# Altium PCB PCB1.PcbDoc
Units mil, origin at the board's own origin, x right, y up, seen from the top; angles counter-clockwise.
Board outline 6000 x 4000 mil, 2 copper layers (Top Layer, Bottom Layer); 70 components, 46 nets, 159 pads, 17 vias.
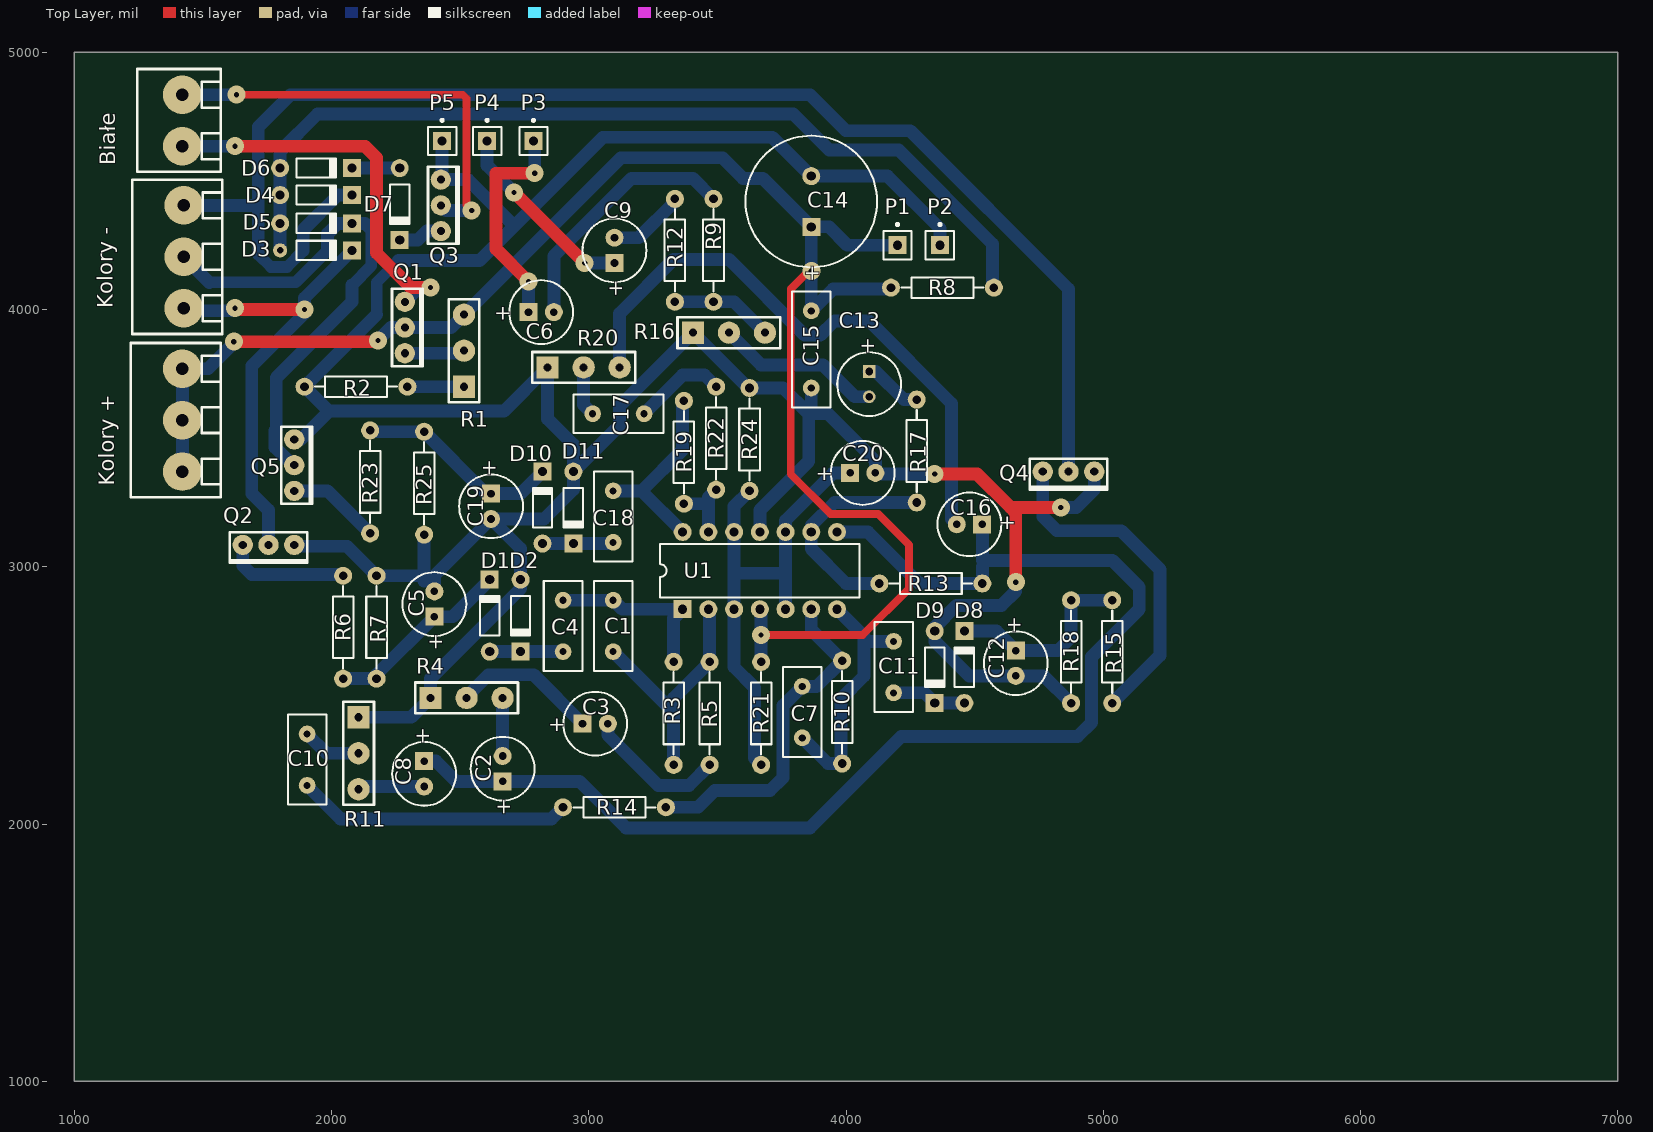
[diagram p0: Top Layer view]
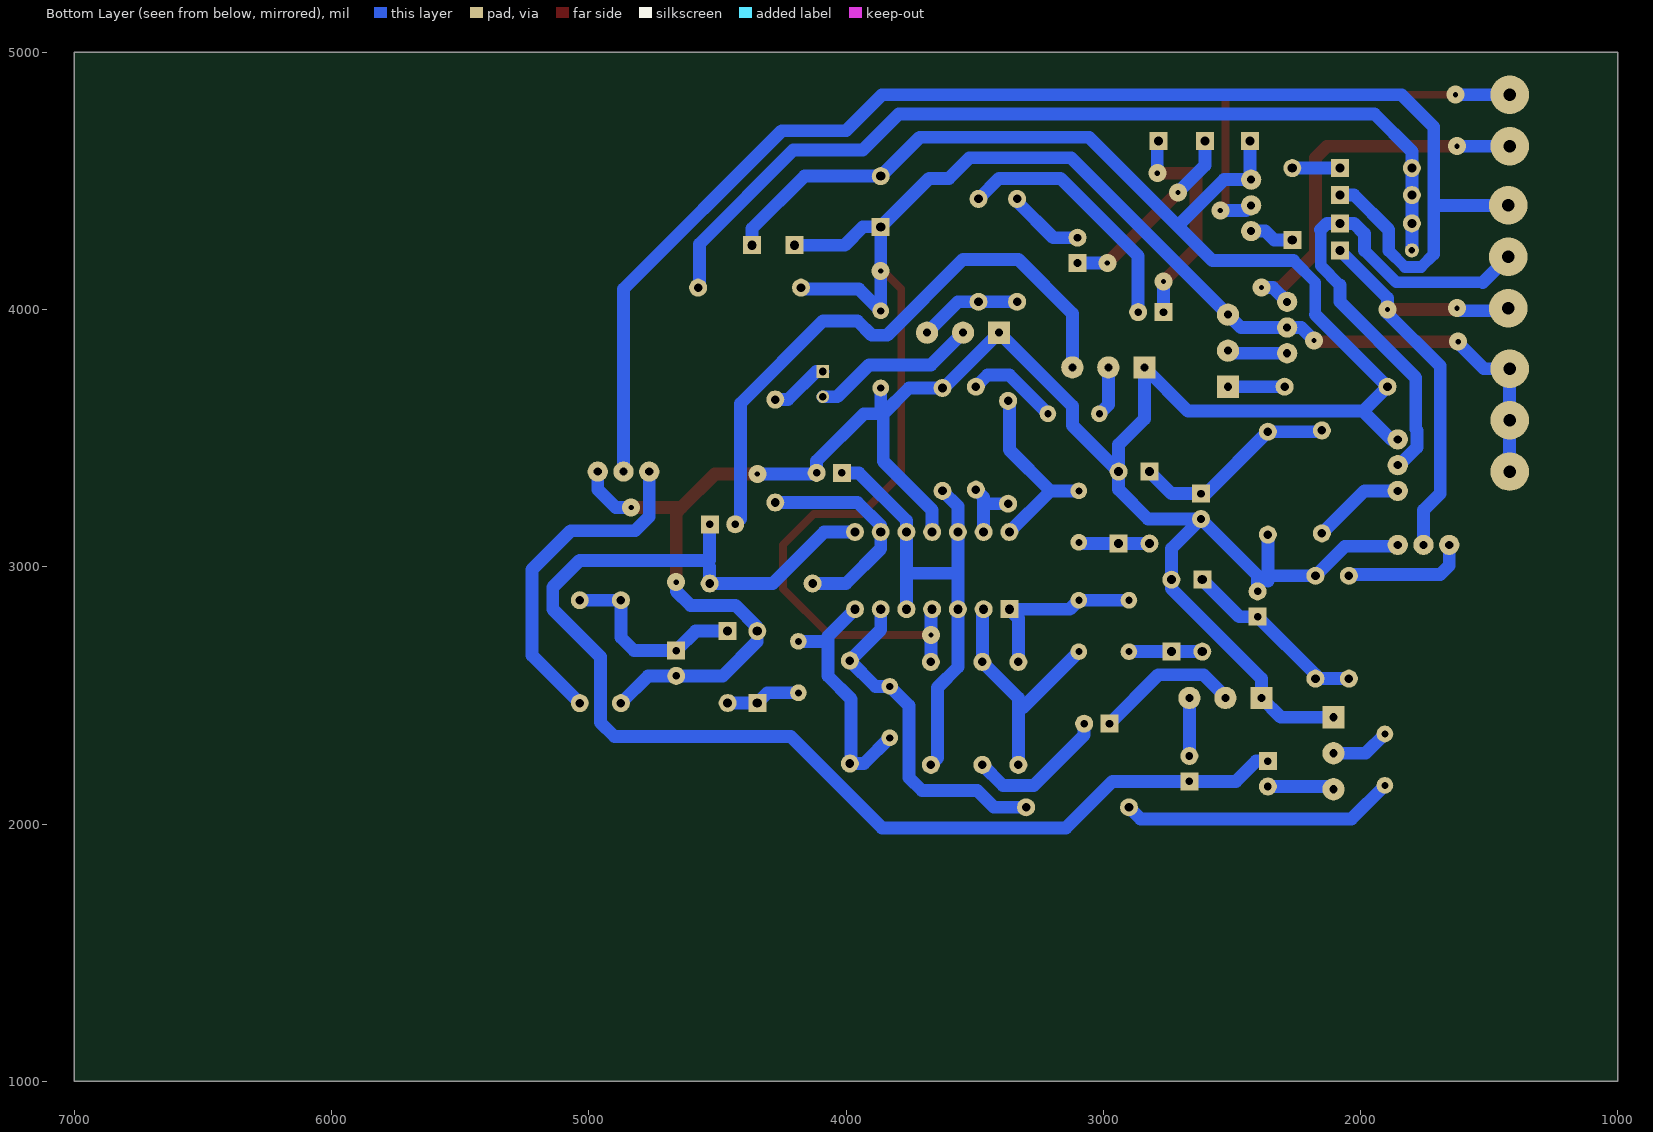
[diagram p1: Bottom Layer view, seen from below]

## Layer stack, top to bottom
Top Solder: solder mask 0.4, Solder Resist, Dk 3.5
Top Layer: signal copper 1.4
Dielectric1: dielectric 12.6, FR-4, Dk 4.8
Bottom Layer: signal copper 1.4
Bottom Solder: solder mask 0.4, Solder Resist, Dk 3.5

## Board outline
1000,1000 7000,1000 7000,5000 1000,5000

## Design rules (kind name [scope] priority, off if disabled: settings)
Clearance [All] p1: gap=10
PolygonConnect [All] p1: connectstyle=Relief reliefconductorwidth=10 reliefentries=4 polygonreliefangle="90 Angle" airgapwidth=10
RoomDefinition Sheet1 [InComponentClass('Sheet1')] p1: confinementstyle=ConfineIn formatcopy=TRUE lockcomponents=FALSE outline 1030,1925 5295,1925 5295,4980 1030,4980
RoutingVias [All] p1: holewidth=28 width=50 viastyle="Through Hole" minholewidth=28 minwidth=50 maxholewidth=28 maxwidth=50
SolderMaskExpansion [All] p1: expansion=4
Width [All] p1: maxlimit=100 minlimit=10 preferedwidth=50
29 further rules are at their usual default settings.

## Components (designator, comment, footprint, x,y, rotation, side; value= is the part's Value field where it differs from the comment)
Białe "ARK" ARK2 1420,4735 r270 top
C1 "Cap" RAD-0.2 3095,2770 r90 top
C2 "Cap Pol1" CAPPR2.5-6.3x5#1 2665,2215 r90 top
C3 "Cap Pol1" CAPPR2.5-6.3x5#1 3025,2390 r0 top
C4 "Cap" RAD-0.2 2900,2770 r270 top
C5 "Cap Pol1" CAPPR2.5-6.3x5#1 2400,2855 r90 top
C6 "Cap Pol1" CAPPR2.5-6.3x5#1 2815,3990 r0 top
C7 "Cap" RAD-0.2 3830,2435 r270 top
C8 "Cap Pol1" CAPPR2.5-6.3x5#1 2360,2195 r270 top
C9 "Cap Pol1" CAPPR2.5-6.3x5#1 3100,4230 r90 top
C10 "Cap" RAD-0.2 1905,2250 r270 top
C11 "Cap" RAD-0.2 4185,2610 r270 top
C12 "Cap Pol1" CAPPR2.5-6.3x5#1 4660,2625 r270 top
C13 "Cap Pol1" CAPPR2.5-6.3x5#2 4090,3710 r270 top
C14 "Cap Pol1" CAPPR5-13x16 3865,4420 r90 top
C15 "Cap" RAD-0.3 3865,3845 r90 top
C16 "Cap Pol1" CAPPR2.5-6.3x5#1 4480,3165 r180 top
C17 "Cap" RAD-0.2 3115,3595 r0 top
C18 "Cap" RAD-0.2 3095,3195 r270 top
C19 "Cap Pol1" CAPPR2.5-6.3x5#1 2620,3235 r270 top
C20 "Cap Pol1" CAPPR2.5-6.3x5#1 4065,3365 r0 top
D1 "Diode 1N4148" DO-35#1 2615,2810 r90 top
D2 "Diode 1N4148" DO-35#1 2735,2810 r270 top
D3 "Diode 1N4148" DO-35#2 1940,4230 r0 top
D4 "Diode 1N4148" DO-35#1 1940,4445 r0 top
D5 "Diode 1N4148" DO-35#1 1940,4335 r0 top
D6 "Diode 1N4148" DO-35#1 1940,4550 r0 top
D7 "Diode 1N4148" DO-35#1 2265,4410 r270 top
D8 "Diode 1N4148" DO-35#1 4460,2610 r90 top
D9 "Diode 1N4148" DO-35#1 4345,2610 r270 top
D10 "Diode 1N4148" DO-35#1 2820,3230 r90 top
D11 "Diode 1N4148" DO-35#1 2940,3230 r270 top
"Kolory +" "ARK3" ARK3 1420,3570 r270 top
"Kolory -" "ARK3" ARK3 1425,4205 r270 top
P1 "Plug" PIN1 4200,4250 r0 top
P2 "Plug" PIN1 4365,4250 r0 top
P3 "Plug" PIN1 2785,4655 r0 top
P4 "Plug" PIN1 2605,4655 r0 top
P5 "Plug" PIN1 2430,4655 r0 top
Q1 "BD139N" BD139N 2285,4030 r270 top
Q2 "BD139N" BD139N 1855,3085 r180 top
Q3 "BD139N" BD139N 2425,4505 r270 top
Q4 "BD139N" BD139N 4965,3370 r180 top
Q5 "BD139N" BD139N 1855,3495 r270 top
R1 "4,7" Potencjometr 2515,3840 r90 top
R2 "Res2" AXIAL-0.4 2095,3700 r0 top
R3 "Res2" AXIAL-0.4 3330,2430 r90 top
R4 "4,7" Potencjometr 2525,2490 r0 top
R5 "Res2" AXIAL-0.4 3470,2430 r90 top
R6 "Res2" AXIAL-0.4 2045,2765 r270 top
R7 "Res2" AXIAL-0.4 2175,2765 r270 top
R8 "Res2" AXIAL-0.4 4375,4085 r180 top
R9 "Res2" AXIAL-0.4 3485,4230 r270 top
R10 "Res2" AXIAL-0.4 3985,2435 r270 top
R11 "4,7" Potencjometr 2105,2275 r270 top
R12 "Res2" AXIAL-0.4 3335,4230 r270 top
R13 "Res2" AXIAL-0.4 4330,2935 r0 top
R14 "Res2" AXIAL-0.4 3100,2065 r0 top
R15 "Res2" AXIAL-0.4 5035,2670 r90 top
R16 "4,7K" Potencjometr 3545,3910 r0 top
R17 "Res2" AXIAL-0.4 4275,3450 r270 top
R18 "Res2" AXIAL-0.4 4875,2670 r90 top
R19 "Res2" AXIAL-0.4 3370,3445 r90 top
R20 "4,7" Potencjometr 2980,3775 r0 top
R21 "Res2" AXIAL-0.4 3670,2430 r270 top
R22 "Res2" AXIAL-0.4 3495,3500 r270 top
R23 "Res2" AXIAL-0.4 2150,3330 r90 top
R24 "Res2" AXIAL-0.4 3625,3495 r270 top
R25 "Res2" AXIAL-0.4 2360,3325 r90 top
U1 "LM324AN" N014 3665,2985 r0 top

## Footprints (in the part's own frame and the unit in brackets; to place one, negate y for a bottom-side part, rotate by r counter-clockwise, add the part's x,y. Pads: shape width x height; smd on the part's side, far side on the other; paste and mask are expansions set on the pad)
ARK2 [mil]
  round 150 hole 48: 1(-100,0) 2(100,0)
  silkscreen extent -200,-175 200,150
ARK3 [mil]
  round 150 hole 48: 1(-200,0) 2(0,0) 3(200,0)
  silkscreen extent -300,-200 300,150
AXIAL-0.4 [mil] "Axial Device, Thru-Hole; 2 Leads; 0.4 in Pin Spacing"
  round 70 hole 33.46: 1(-200,0) 2(200,0)
  silkscreen extent -160,-40 160,40
BD139N [mm]
  round 2 hole 0.8: 1(5.08,0) 2(2.54,0) 3(0,0)
  silkscreen extent -1.27,-1.27 6.35,1.78
CAPPR2.5-6.3x5#1 [mil] "Capacitor, Electrolytic, Radial; Body 6.3 x 5 mm (Dia.xH typ); Pin Spacing 2.5 mm (typ)"
  rect 70x70 hole 29.53: 1(-49.21,0)
  round 70 hole 29.53: 2(49.21,0)
  silkscreen extent -124,-124 124,124
CAPPR2.5-6.3x5#2 [mil] "Capacitor, Electrolytic, Radial; Body 6.3 x 5 mm (Dia.xH typ); Pin Spacing 2.5 mm (typ)"
  rect 49.21x49.21 hole 29.53: 1(-49.21,0)
  round 49.21 hole 29.53: 2(49.21,0)
  silkscreen extent -124,-124 124,124
CAPPR5-13x16 [mil] "Capacitor, Electrolytic, Radial; Body 13 x 16 mm (Dia.xH typ); Pin Spacing 5 mm (typ)"
  rect 70x70 hole 35.43: 1(-98.43,0)
  round 70 hole 35.43: 2(98.43,0)
  silkscreen extent -256,-256 256,256
DO-35#1 [mil] "Diode, Axial; Body 3.8 x 1.9 mm (LxDia. max), Lead Dia. 0.53 mm (max)"
  round 70 hole 35.43: 1(-139.76,0)
  rect 70x70 hole 35.43: 2(139.76,0)
  silkscreen extent -77,-37 81,37
DO-35#2 [mil] "Diode, Axial; Body 3.8 x 1.9 mm (LxDia. max), Lead Dia. 0.53 mm (max)"
  round 55 hole 25: 1(-139.76,0)
  rect 70x70 hole 35.43: 2(139.76,0)
  silkscreen extent -77,-37 81,37
N014 [mil] "DIP; 14 Leads; Row Spacing 7.62 mm; Pitch 2.54 mm"
  rect 70x70 hole 35.43: 1(-300,-150)
  round 70 hole 35.43: 2(-200,-150) 3(-100,-150) 4(0,-150) 5(100,-150) 6(200,-150) 7(300,-150) 8(300,150) 9(200,150) 10(100,150) 11(0,150) 12(-100,150) 13(-200,150) 14(-300,150)
  silkscreen extent -388,-104 388,104
PIN1 [mil] "Connector; Plug"
  rect 70x70 hole 35.43: 1(0,0)
  silkscreen extent -55,-55 55,86
Potencjometr [mm]
  rect 2.2x2.2 hole 0.8: 1(-3.556,0)
  round 2.2 hole 0.8: 2(0,0) 3(3.556,0)
  silkscreen extent -5.08,-1.52 5.08,1.52
RAD-0.2 [mil] "Radial Cap, Thru-Hole; 2 Leads; 0.2 in Pin Spacing"
  round 65 hole 27.56: 1(-100,0) 2(100,0)
  silkscreen extent -175,-75 175,75
RAD-0.3 [mil] "Radial Cap, Thru-Hole; 2 Leads; 0.3 in Pin Spacing"
  round 65 hole 27.56: 1(-150,0) 2(150,0)
  silkscreen extent -225,-75 225,75

## Part data
C1 C4 C7 C10 C11 C15 C17 C18: "Capacitor"
C2 C3 C5 C6 C8 C9 C12 C13 C14 C16 C19 C20: "Polarized Capacitor (Radial)"
D1 D2 D3 D4 D5 D6 D7 D8 D9 D10 D11: "High Conductance Fast Diode"
R1 R4 R11 R16 R20: library part Potencjometr
R2 R3 R5 R6 R7 R8 R9 R10 R12 R13 R14 R15 R17 R18 R19 R21 R22 R23 R24 R25: "Resistor"
U1: "Quadruple Operational Amplifier"

## Via types
v1: diameter 70, hole 20, Top Layer to Bottom Layer, 17 vias

## Nets (pads, with @x,y where several pads share a name; then routed paths per layer and width w, separated by ;. In a path a pad name is that pad's centre, name@x,y a point inside that pad or via, vN(x,y) a via of type N, cw(c..) or ccw(c..) an arc to the next point about the centre after c; other vN are vias at no path point)
GND: C5.2 C12.2 C14.2 C15.1 C19.2 C20.2 D2.1 D9.1 D11.1 P2.1 P5.1 Q2.3 Q3.3 Q4.3 Q5.3 R2.1 R4.1 R7.1 R11.1 R16.1 R18.1 R20.1 R24.1 R25.1 U1.11 | length 12783.7
  Top Layer w50: v1(4345,3360) 4510,3360 4640,3230 ; v1(4660,2940) 4660,3210 4640,3230 ; v1(4835,3230) 4640,3230
  Bottom Layer w45: 2175,3980 2175,4105 2260,4190
  Bottom Layer w50: Q2.3 1860,3080 2060,3080 R7.1 2339.21,2965 ; Q5.3 1880,3495 1990,3605 ; R11.1 2310,2415 R4.1 2385,2565 2735,2915 D2.1 2735,3070.79 C19.2 ; 2175,3980 R2.1 1990,3605 ; 2260,4190 2575,4190 3055,4670 3713.43,4670 C14.2 4161.57,4518.43 4365,4315 P2.1 ; 2360,2944.21 R25.1 ; C5.2 2400,2965.79 C19.2 ; Q3.3 2530,4505 2707.5,4327.5 ; Q3.3@2430,4510 P5.1 ; U1.11 3665,3220 3855,3410 3855,3595 ; 3865,3605 C15.1 ; v1(4345,3360) 4119.21,3360 C20.2 4114.21,3410.79 3930,3595 3855,3595 ; v1(4660,2940) 4660,2905 4605,2850 4430,2850 4345,2765 D9.1 4345,2710 4479.21,2575.79 C12.2 4769.21,2575.79 R18.1 ; v1(4835,3230) 4895,3230 4965,3300 Q4.3 ; 1990,3605 2670,3605 R20.1 2840,3575 2940,3475 D11.1 ; C19.2 2825.79,3185.79 2940,3300 D11.1 ; D11.1 3120,3549.76 3120,3625 R16.1 3620,3695 R24.1 3755,3695 3855,3595
NetBiałe_1: Białe.1 Q3.2 | length 1682.8
  Top Layer w30: v1(1630,4835) 2510,4835 2525,4820 2525,4405 v1(2545,4385)
  Bottom Layer w50: Białe.1 v1(1630,4835) ; Q3.2 2445,4385 v1(2545,4385)
NetBiałe_2: Białe.2 Q1.3 | length 1532.3
  Top Layer w50: v1(1625,4635) 2130,4635 2175,4590 2175,4220 2310,4085 v1(2385,4085)
  Bottom Layer w50: Białe.2 v1(1625,4635) ; Q1.3 2340,4085 v1(2385,4085)
NetC1_1: C1.1 R3.1 R5.2 U1.2 | length 976.2
  Bottom Layer w50: C1.1 3315,2450 ; R3.1 3330,2490 R5.2 3470,2830 U1.2
NetC1_2: C1.2 C4.1 R3.2 U1.1 | length 699
  Bottom Layer w50: C4.1 C1.2 3130,2835 U1.1 3330,2800 R3.2
NetC2_1: C2.1 C8.1 C16.1 R13.2 U1.8 | length 4979.4
  Bottom Layer w50: C8.1 2405.79,2244.21 2484.21,2165.79 C2.1 2964.21,2165.79 3145,1985 3860,1985 4215,2340 4900,2340 4955,2395 4955,2650 5140,2835 5140,2920 5035,3025 4530,3025 C16.1@4530,3164.21 ; U1.8 4085,3135 4285,2935 R13.2 4530,3000
NetC2_2: C2.2 R4.3 | length 225.8
  Bottom Layer w50: C2.2 R4.3
NetC3_1: C3.1 R4.2 | length 569.7
  Bottom Layer w50: R4.2 2525,2495 2610,2580 2785.79,2580 C3.1
NetC3_2: C3.2 R5.1 | length 554.2
  Bottom Layer w50: C3.2 3074.21,2345.79 3270,2150 3390,2150 R5.1
NetC4_2: C4.2 D1.1 D2.2 | length 284.8
  Bottom Layer w50: D1.1@2615.24,2670 C4.2
NetC5_1: C5.1 D1.2 R6.2 R7.2 | length 738.6
  Bottom Layer w50: R6.2 R7.2 2175,2580.79 C5.1 2471.02,2805.79 D1.2
NetC6_1: C6.1 P3.1 | length 862.1
  Top Layer w50: v1(2765.79,4109.21) 2640,4235 2640,4530 v1(2790,4530)
  Bottom Layer w50: C6.1 v1(2765.79,4109.21) ; v1(2790,4530) P3.1@2790,4650
NetC6_2: C6.2 R9.1 | length 992.1
  Bottom Layer w50: C6.2 2864.21,4208.43 ; 2867.89,4212.11 3165.79,4510 3405,4510 R9.1
NetC7_1: C7.1 R10.1 R14.2 U1.6 | length 1334.8
  Bottom Layer w50: R14.2 3425,2065 3490,2130 3705,2130 3755,2180 3755,2460 C7.1 3885,2535 R10.1 3865,2755 U1.6
NetC7_2: C7.2 C11.1 R10.2 U1.7 | length 974.3
  Bottom Layer w50: C7.2 3930,2235 R10.2 3980,2240 3980,2485 4070,2575 4070,2730 U1.7 ; 4090,2710 C11.1
NetC8_2: C8.2 R11.3 | length 244.2
  Bottom Layer w50: R11.3@2115.79,2145.79 C8.2
NetC9_1: C9.1 P4.1 | length 747.1
  Top Layer w50: v1(2710,4455) v1(2984.21,4180.79)
  Bottom Layer w50: P4.1 2605,4560 v1(2710,4455) ; v1(2984.21,4180.79) C9.1
NetC9_2: C9.2 R12.1 | length 284.1
  Bottom Layer w50: C9.2@3119.21,4279.21 3194.21,4279.21 3335,4420 R12.1
NetC10_1: C10.1 R11.2 | length 231.1
  Bottom Layer w50: C10.1 1980,2275 R11.2
NetC10_2: C10.2 R14.1 | length 1067.5
  Bottom Layer w50: C10.2 2035,2020 2855,2020 R14.1
NetC11_2: C11.2 D8.1 D9.2 | length 291.5
  Bottom Layer w50: C11.2 4305.24,2510 D9.2 D8.1
NetC12_1: C12.1 D8.2 R15.2 R18.2 | length 742.3
  Bottom Layer w50: D8.2 4584.45,2749.76 C12.1 4824.21,2674.21 4875,2725 R18.2 R15.2@5005,2870
NetC13_1: C13.1 R17.1 | length 230.9
  Bottom Layer w50: C13.1 4090.79,3760 4115,3760 4225,3650 R17.1
NetC13_2: C13.2 R16.2 | length 648.2
  Bottom Layer w50: R16.2 3670,3785 3910,3785 4034.21,3660.79 C13.2
NetC16_2: C16.2 R20.3 | length 2343.1
  Bottom Layer w50: R20.3 3120,3985 3330,4195 3545,4195 3840,3900 3900,3900 3955,3955 4090,3955 4410,3635 4410,3185.79 C16.2
NetC17_1: C17.1 R20.2 | length 194.5
  Bottom Layer w50: R20.2 2980,3630 C17.1
NetC17_2: C17.2 R22.1 | length 360.8
  Bottom Layer w50: C17.2 3365,3745 3450,3745 R22.1
NetC18_1: C18.1 R19.2 U1.14 | length 752.5
  Bottom Layer w50: C18.1 3205,3295 ; U1.14 3205,3295 ; R19.2@3365,3645 3365,3455 3205,3295
NetC18_2: C18.2 D10.1 D11.2 | length 270.2
  Bottom Layer w50: D10.1 D11.2 C18.2@3090.24,3090.24
NetC19_1: C19.1 D10.2 R23.2 R25.2 | length 800.2
  Bottom Layer w50: R23.2@2155,3525 R25.2 2600.79,3284.21 C19.1 2734.45,3284.21 D10.2
NetC20_1: C20.1 R21.2 R24.2 U1.3 U1.5 U1.10 U1.12 | length 2005.8
  Bottom Layer w50: R24.2 3565,3235 U1.12 3565,2975 ; R21.2 3643.75,2256.25 3643.75,2531.25 3565,2610 U1.3 3565,2975 ; U1.5 3765,2975 ; C20.1 3950,3365 3765,3180 U1.10 3765,2975 ; 3565,2975 3765,2975
NetD3_1: D3.1 D4.1 D5.1 D6.1 R8.1 | length 3599
  Bottom Layer w50: D3.1 D6.1 1800.24,4615 1945.24,4760 3795,4760 3935,4620 4205,4620 4570,4255 R8.1@4570,4080
NetD3_2: "Kolory -.3" D3.2 Q2.2 | length 1809.3
  Top Layer w50: v1(1625,4005) 1630,4000 v1(1895,4000)
  Bottom Layer w50: 1425,3995 1615,3995 v1(1625,4005) ; Q2.2 1755,3220 1690,3285 1690,3780 1895,3985 1895,4045 D3.2@2079.76,4229.76
NetD4_2: "Kolory -.1" D4.2 Q4.2 | length 5565.4
  Bottom Layer w45: 1715,4215 1764.53,4165.47 1826.96,4165.47 1890,4228.51
  Bottom Layer w50: 1430,4400 1425,4405 1715,4405 ; 1715,4215 1715,4405 ; 1890,4228.51 1890,4310 2025,4445 D4.2 ; Q4.2 4865,4080 4250,4695 4000,4695 3860,4835 1840,4835 1715,4710 1715,4405
NetD5_2: "Kolory -.2" D5.2 Q5.2 | length 2018.6
  Bottom Layer w45: 1524.53,4105.47 1860.47,4105.47 1985,4230 ; 2080,4094.85 2155,4169.85 2155,4310
  Bottom Layer w50: 1425,4205 1524.53,4105.47 ; Q5.2 1849.82,3395 1780.63,3464.19 1780.63,3530.18 1785,3534.55 1785,3735 2080,4030 2080,4094.85 ; 1985,4230 1985,4295 2025,4335 D5.2 2130,4335 2155,4310
NetD6_2: D6.2 D7.1 | length 185
  Bottom Layer w50: D6.2 D7.1@2264.76,4550
NetD7_2: D7.2 Q3.1 | length 174.4
  Bottom Layer w50: D7.2 2335.24,4270.24 2370,4305 Q3.1
NetQ1_1: Q1.1 R1.2 | length 234.1
  Bottom Layer w50: Q1.1 2505,3830 R1.2
NetQ2_1: Q2.1 R6.1 | length 479.5
  Bottom Layer w50: Q2.1 1655,3005 1690,2970 R6.1@2040,2970
NetQ4_1: Q4.1 R15.1 | length 1311.5
  Bottom Layer w50: Q4.1 4765,3195 4820,3140 5070,3140 5220,2990 5220,2655 R15.1
NetQ5_1: Q5.1 R23.1 | length 363.3
  Bottom Layer w50: Q5.1 1985,3295 R23.1
NetR1_1: R1.1 R2.2 | length 220
  Bottom Layer w50: R2.2 R1.1
NetR9_2: R9.2 R12.2 R16.3 | length 399.7
  Bottom Layer w50: R12.2 R9.2 3565,4030 R16.3
NetR13_1: R13.1 R17.2 U1.9 | length 858.2
  Bottom Layer w50: R13.1 4000,2935 3865,3070 U1.9 3865,3160 3955,3250 R17.2
NetR19_1: R19.1 R22.2 U1.13 | length 247.4
  Bottom Layer w50: R19.1 3440,3245 ; U1.13 3465,3270 R22.2
VCC: "Kolory +.1" "Kolory +.2" "Kolory +.3" C14.1 C15.2 P1.1 Q1.2 R1.3 R8.2 R21.1 U1.4 | length 6757
  Top Layer w30: v1(3670,2735) 4065,2735 4245,2915 4245,3085 4125,3205 3940,3205 3785,3360 3785,4080 v1@3860,4155
  Top Layer w50: v1(1620,3875) 2175,3875 v1(2180,3880)
  Bottom Layer w50: 1420,3370 1420,3570 1420,3770 1520,3770 1625,3875 v1(1620,3875) ; v1@2180,3880.18 v1(2180,3880) 2230,3930 Q1.2 2465,3930 R1.3 3125,4590 3520,4590 3600,4510 3610,4510 3676.57,4510 C14.1 ; R21.1 v1(3670,2735) U1.4@3670,2830 ; R8.2@4170,4080 3950,4080 C15.2 v1(3865,4150) C14.1 ; P1.1 4005,4250 3933.43,4321.57 C14.1

## Text inside footprints (layer, text, board x,y; h text height)
C2: Top Overlay "+" at 2694.53,2032.91 h59.06 r90
C3: Top Overlay "+" at 2842.91,2360.47 h59.06
C5: Top Overlay "+" at 2429.53,2672.91 h59.06 r90
C6: Top Overlay "+" at 2632.91,3960.47 h59.06
C8: Top Overlay "+" at 2330.47,2377.09 h59.06 r270
C9: Top Overlay "+" at 3129.53,4047.91 h59.06 r90
C12: Top Overlay "+" at 4630.47,2807.09 h59.06 r270
C13: Top Overlay "+" at 4060.47,3892.09 h59.06 r270
C14: Top Overlay "+" at 3894.53,4106.02 h59.06 r90
C16: Top Overlay "+" at 4662.09,3194.53 h59.06 r180
C19: Top Overlay "+" at 2590.47,3417.09 h59.06 r270
C20: Top Overlay "+" at 3882.91,3335.47 h59.06